# Altium PCB ThermalType_Arduino_v0.1.PcbDoc
Units mil, origin at the board's own origin, x right, y up, seen from the top; angles counter-clockwise.
Board outline 1800 x 1940 mil, 2 copper layers (Top Layer, Bottom Layer); 18 components, 25 nets, 104 pads, 69 vias.
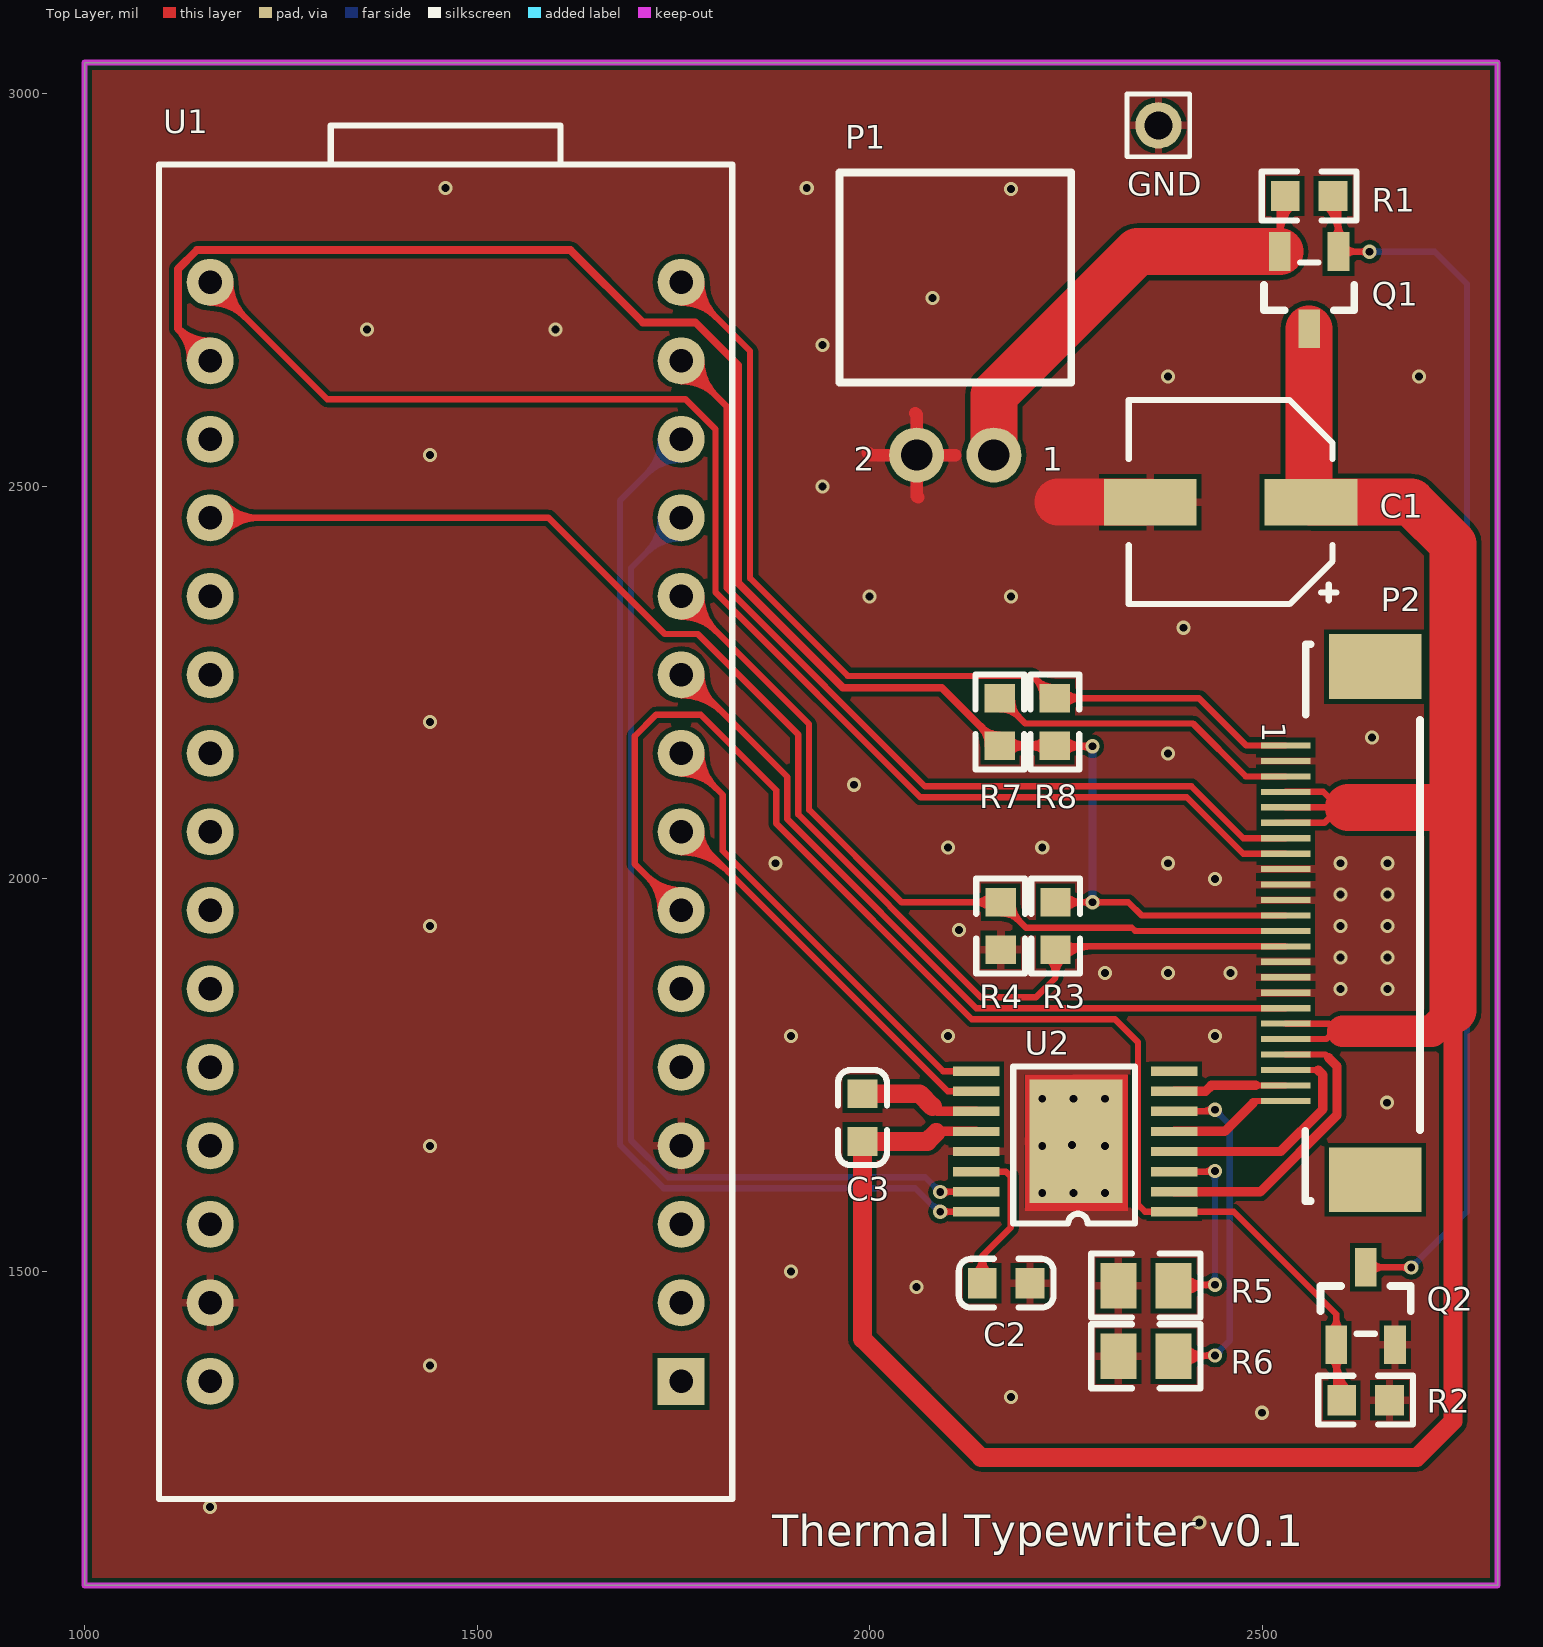
[diagram p0: Top Layer view]
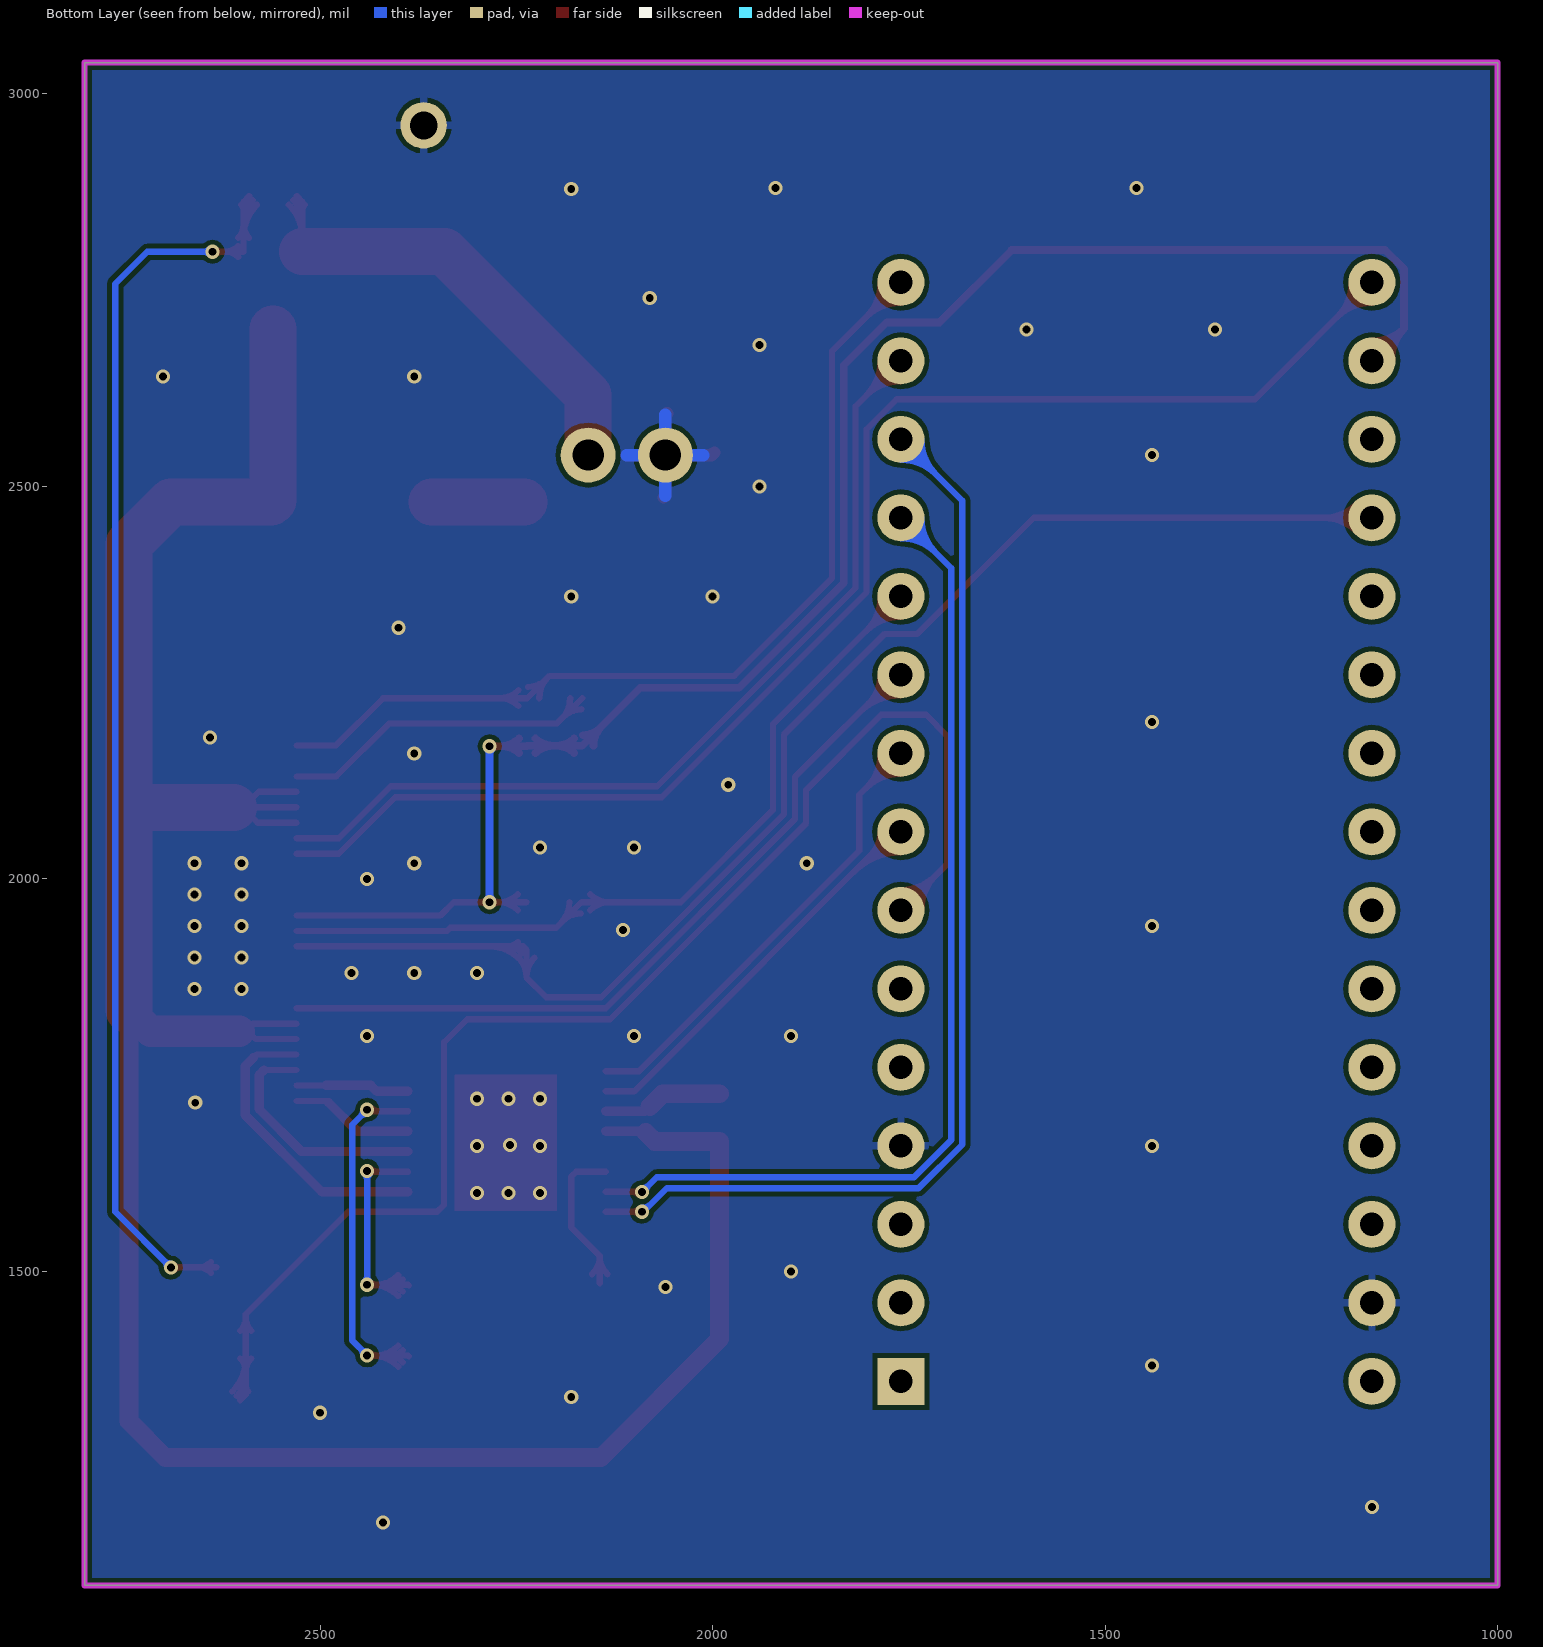
[diagram p1: Bottom Layer view, seen from below]
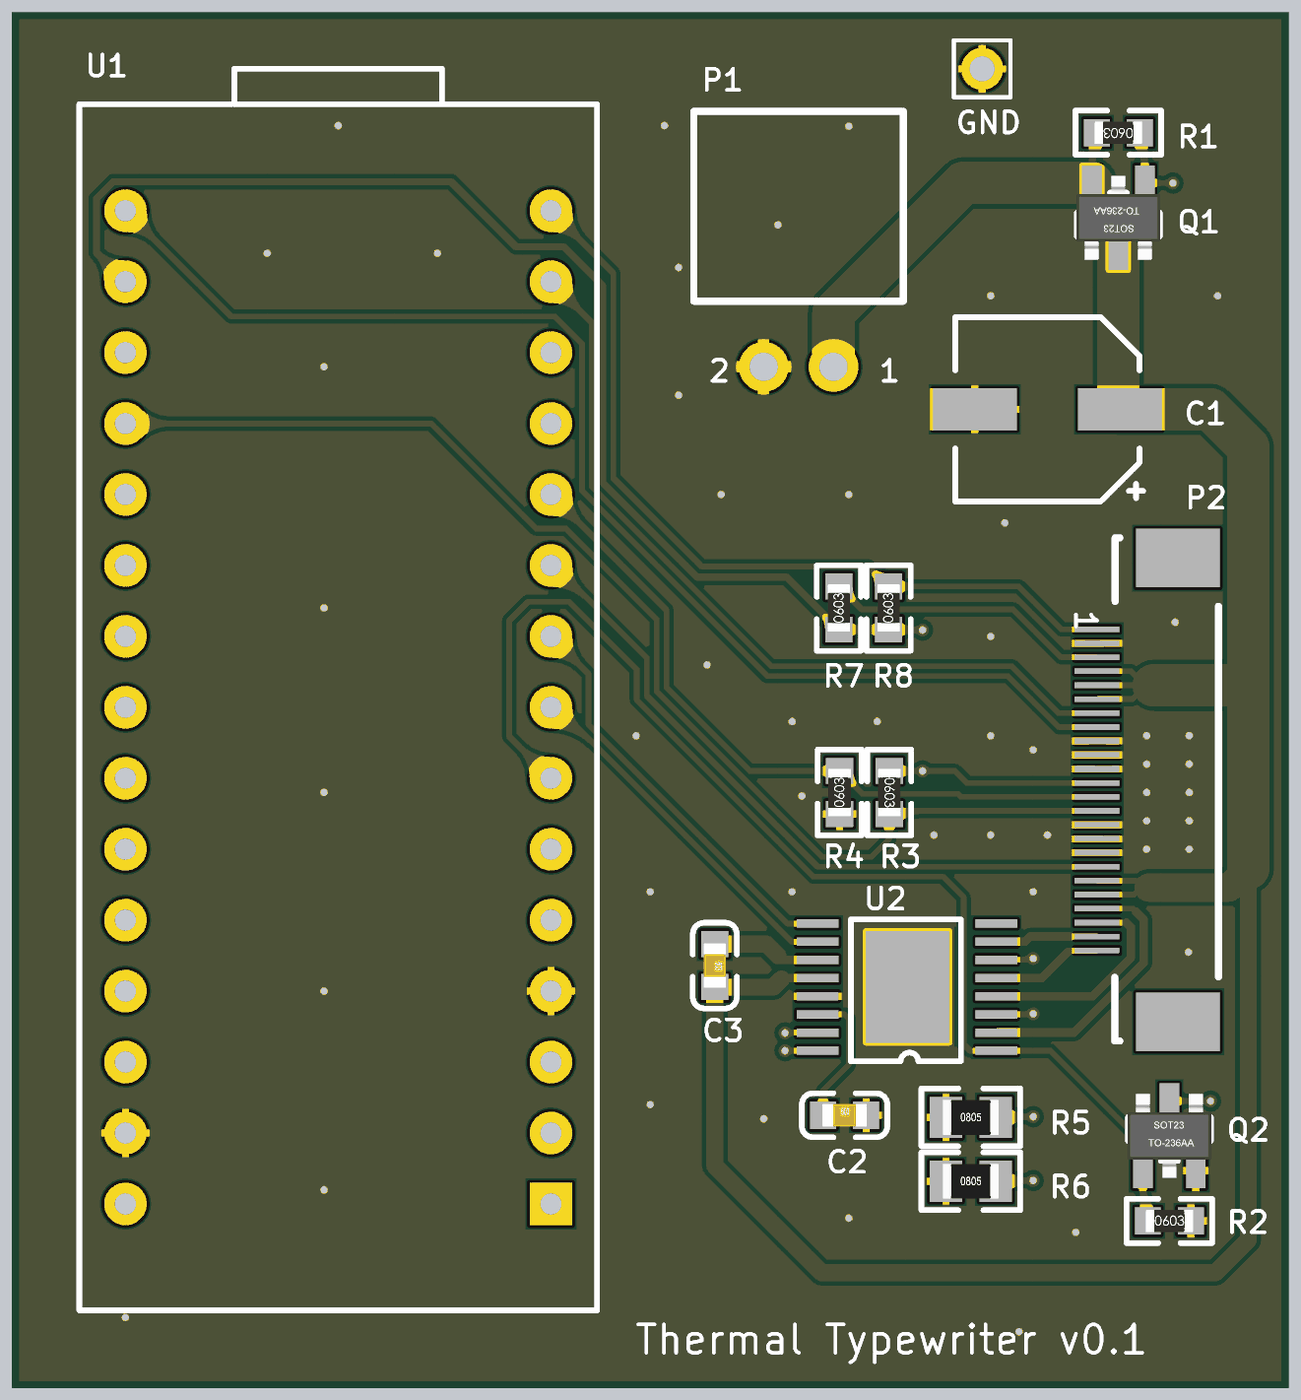
[diagram p2: 3D render of the assembled board from above, using the file's embedded part models]

## Layer stack, top to bottom
Top Layer: signal copper 1.4
Dielectric: dielectric 12.6, FR-4, Dk 4.8
Bottom Layer: signal copper 1.4

## Board outline
1000,1100 1000,3040 2800,3040 2800,1100

## Design rules (kind name [scope] priority, off if disabled: settings)
Clearance [All] p1: gap=6
MinimumSolderMaskSliver [All] p1: minsoldermaskwidth=3
PolygonConnect PolygonConnect_1 [IsVia] p1: connectstyle=Direct reliefconductorwidth=10 reliefentries=4 polygonreliefangle="90 Angle"
PolygonConnect [All] p2: connectstyle=Relief reliefconductorwidth=10 reliefentries=4 polygonreliefangle="90 Angle"
RoutingVias [All] p1: holewidth=10 width=18 viastyle="Through Hole" minholewidth=10 minwidth=18 maxholewidth=28 maxwidth=50
SilkToSilkClearance [All] p1: silktosilkclearance=3
SilkscreenOverComponentPads [All] p1: minsilkscreentomaskgap=3
SolderMaskExpansion [All] p1: expansion=4
TestPointUsage [All] p1: valid=0 allowmultiple=FALSE
Testpoint [All] p1: side=15 testpointundercomponent=TRUE minsize=40 maxsize=100 preferedsize=60 minholesize=0 maxholesize=40 preferedholesize=32 testpointgrid=1 style=1023 order=0123456789
Width [All] p1: maxlimit=100 minlimit=6 preferedwidth=10 minimp=50.000000 maximp=50.000000 favimp=50.000000
21 further rules are at their usual default settings.

## Components (designator, comment, footprint, x,y, rotation, side; value= is the part's Value field where it differs from the comment)
C1 "100uF/16V" CAP6.3*5.5 2460,2480 r180 top
C2 "2.2uF" LC-0603_C 2174,1485 r0 top
C3 "0.01uF" LC-0603_C 1991,1696 r90 top
GND "TP" TP 2368,2960 r0 top
P1 "Header 2" YX-XH-2-2.54-90 2109.21,2540 r180 top
P2 "Header 24" A1251AWV-24-0.5 2530,2170 r270 top
Q1 "2333" LC-SOT-23(SOT-23-3) 2560,2750 r90 top
Q2 "2N7002" LC-SOT-23(SOT-23-3) 2632,1456 r270 top
R1 "10K" LC-0603_R 2560,2870 r180 top
R2 "100K" LC-0603_R 2632,1336 r0 top
R3 "51K,1%" LC-0603_R 2237,1940 r90 top
R4 "10K" LC-0603_R 2167,1940 r270 top
R5 "0R6" LC-0805_R 2352,1482 r0 top
R6 "0R6" LC-0805_R 2352,1392 r0 top
R7 "200R" LC-0603_R 2166,2200 r270 top
R8 "22K" LC-0603_R 2236,2200 r270 top
U1 "arduinoNano" "ARDUINO NANO" 1760,1360 r90 top
U2 "DRV8833" HTSSOP-16 2388,1576 r180 top

## Footprints (in the part's own frame and the unit in brackets; to place one, negate y for a bottom-side part, rotate by r counter-clockwise, add the part's x,y. Pads: shape width x height; smd on the part's side, far side on the other; paste and mask are expansions set on the pad)
A1251AWV-24-0.5 [mm] "0.5mm间距立式单排接插件-24p"
  rect 2.1x3 smd: 0(-2.55,2.9) 0(14.05,2.9)
  rect 0.2x1.6 smd: 1(0,0) 2(0.5,0) 3(1,0) 4(1.5,0) 5(2,0) 6(2.5,0) 7(3,0) 8(3.5,0) 9(4,0) 10(4.5,0) 11(5,0) 12(5.5,0) 13(6,0) 14(6.5,0) 15(7,0) 16(7.5,0) 17(8,0) 18(8.5,0) 19(9,0) 20(9.5,0) 21(10,0) 22(10.5,0) 23(11,0) 24(11.5,0)
  silkscreen extent -3.28,0.64 14.74,4.35
"ARDUINO NANO" [mil]
  rect 60x60 hole 30: 1(0,0)
  round 60 hole 30: 2(100,0) 3(200,0) 4(300,0) 5(400,0) 6(500,0) 7(600,0) 8(700,0) 9(800,0) 10(900,0) 11(1000,0) 12(1100,0) 13(1200,0) 14(1300,0) 15(1400,0) 16(1400,600) 17(1300,600) 18(1200,600) 19(1100,600) 20(1000,600) 21(900,600) 22(800,600) 23(700,600) 24(600,600) 25(500,600) 26(400,600) 27(300,600) 28(200,600) 29(100,600) 30(0,600)
  silkscreen extent -150,-65 1600,665
CAP6.3*5.5 [mm] "6.3mm直径贴片电解电容，高度5.5mm"
  rect 3x1.5 smd: 1(-2.6,0) 2(2.6,0)
  silkscreen extent -3.43,-3.3 3.3,3.3, body extent -3.19,-3.09 3.19,3.3, height 5.5
HTSSOP-16 [mm]
  rect 1.5x0.3 smd: 1(0,0) 2(0,-0.65) 3(0,-1.3) 4(0,-1.95) 5(0,-2.6) 6(0,-3.25) 7(0,-3.9) 8(0,-4.55) 9(6.4,-4.55) 10(6.4,-3.9) 11(6.4,-3.25) 12(6.4,-2.6) 13(6.4,-1.95) 14(6.4,-1.3) 15(6.4,-0.65) 16(6.4,0)
  rect 3x4 smd: 13(3.175,-2.286)
  silkscreen extent 1.27,-4.7 5.21,0.38
LC-0603_C [mm]
  rect 0.93x0.98 smd: 1(-0.77,0) 2(0.77,0)
  silkscreen extent -1.53,-0.79 1.54,0.79, body extent -0.8,-0.4 0.8,0.4, height 0.3
LC-0603_R [mm]
  rect 0.93x0.98 smd: 1(-0.77,0) 2(0.77,0)
  silkscreen extent -1.53,-0.79 1.54,0.79, body extent -0.85,-0.4 0.85,0.4, height 0.56
LC-0805_R [mm]
  rect 1.16x1.47 smd: 1(-0.89,0) 2(0.89,0)
  silkscreen extent -1.77,-1.04 1.77,1.03, body extent -1,-0.62 1,0.63, height 0.49
LC-SOT-23(SOT-23-3) [mm]
  rect 1.25x0.7 smd: 1(1.25,-0.95) 2(1.25,0.95) 3(-1.25,0)
  silkscreen extent -0.65,-1.46 0.9,1.46, body extent -1.5,-1.5 1.5,1.5, height 1.3
TP [mm] "测试点，无需焊接"
  round 1.5 hole 0.9: 1(0,0)
  silkscreen extent -1.02,-1.02 1.02,1.02
YX-XH-2-2.54-90 [mil] "2.5mm间距单排接插件-2p"
  round 70 hole 40: 1(-49.21,0) 2(49.21,0)
  silkscreen extent -148,-360 148,-93

## Part data
C1 C2 C3: library part 0603C, "0603C"
GND: library part Socket, "Socket"
P1: "Header, 2-Pin"
P2: library part PT48D-HLV
Q1: library part CJ2333, "P-MOS"
Q2: library part NMOS-2, "N-Channel Power MOSFET"
R1 R2 R3 R4 R5 R6 R7 R8: library part 0603R, "0603R"

## Via types
v1: diameter 18, hole 10, Top Layer to Bottom Layer, tented both sides, 69 vias

## Nets (pads, with @x,y where several pads share a name; then routed paths per layer and width w, separated by ;. In a path a pad name is that pad's centre, name@x,y a point inside that pad or via, vN(x,y) a via of type N, cw(c..) or ccw(c..) an arc to the next point about the centre after c; other vN are vias at no path point)
+3.3V: P2.12 R3.2 R7.2 R8.2 U1.17 | length 2713.9
  Top Layer w8: R3.2 v1(2284,1970.32) 2329.68,1970.32 2346.54,1953.46 P2.12 ; R3.2@2248.1,1960.2 cw(c2272.52,1935.77) 2272.52,1970.32 cw(c2272.52,2004.86) R3.2@2248.1,1980.43 ; v1@2280.46,1966.78 ccw(c2271.93,1958.24) 2271.93,1970.32 ccw(c2271.93,1982.39) v1@2280.46,1973.85 ; v1@2287.54,1966.78 cw(c2296.07,1958.24) 2296.07,1970.32 cw(c2296.07,1982.39) v1@2287.54,1973.85
  Top Layer w10: U1.17@1135.01,2660.72 ccw(c1080.3,2662.3) 1119,2701 ; U1.17@1145.01,2660.43 ccw(c1112.18,2661.38) 1135.4,2684.6 ccw(c1158.62,2707.82) U1.17@1159.57,2674.99 ; U1.17@1159.28,2684.99 cw(c1157.7,2739.7) 1119,2701 ; U1.17 1119,2701 ; 2141.6,2194.08 cw(c2117.21,2169.68) R7.2@2151.71,2169.68 ; 2143.98,2191.71 ccw(c2165.02,2212.74) R7.2@2165.02,2182.99 ; R7.2@2176.39,2160.28 cw(c2199.11,2137.56) 2199.11,2169.68 cw(c2199.11,2201.81) R7.2@2176.39,2179.09 ; R8.2@2225.61,2160.28 ccw(c2202.89,2137.56) 2202.89,2169.68 ccw(c2202.89,2201.81) R8.2@2225.61,2179.09 ; R8.2@2246.39,2160.28 cw(c2267.46,2139.21) 2267.46,2169 ; R8.2@2246.39,2179.09 ccw(c2270.76,2203.46) 2270.76,2169 ; v1@2281.17,2166.17 ccw(c2274.34,2159.34) 2274.34,2169 ccw(c2274.34,2178.66) v1@2281.17,2171.83 ; v1(2284,2169) 2236.68,2169 R8.2 R7.2 2092.06,2243.62 1966.16,2243.62 1832.8,2376.99 1832.8,2654.2 1778,2709 1711,2709 1619,2801 1143.02,2801 1119,2776.98 1119,2701
  Bottom Layer w10: v1@2281.17,1973.14 ccw(c2274.34,1979.97) 2284,1979.97 ccw(c2293.66,1979.97) v1@2286.83,1973.14 ; v1@2281.17,2166.17 cw(c2274.34,2159.34) 2284,2159.34 cw(c2293.66,2159.34) v1@2286.83,2166.17 ; v1(2284,1970.32) v1(2284,2169)
BATTERY: P1.1 Q1.2 R1.2 | length 712.3
  Top Layer w8: Q1.2@2515.68,2816.95 ccw(c2498.99,2833.65) 2522.6,2833.65 ccw(c2546.21,2833.65) Q1.2@2529.51,2816.95 ; R1.2@2519.57,2858.9 cw(c2512.25,2851.58) R1.2@2522.6,2851.58 ; Q1.2 2522.6,2862.91 R1.2 ; Q1.2@2522.6,2817.37 cw(c2581.33,2817.37) R1.2@2539.8,2858.9 ; 2522.6,2836.68 cw(c2562.02,2836.68) R1.2@2534.14,2864.56
  Top Layer w60: P1.1 2158.43,2616.43 2341.21,2799.21 Q1.2
GND: C1.2 C2.2 GND.1 P1.2 P2.2 P2.9 P2.10 P2.11 P2.15 P2.16 P2.17 Q2.2 R2.2 R4.2 R5.1 R6.1 U1.4 U1.29 U2.13 | length 539.4
  Top Layer w16: 1998,2543 2001,2540 P1.2 ; 2058,2593 2060,2591 P1.2 ; 2062,2486 2060,2488 P1.2 ; 2109.43,2540 P1.2
  Top Layer w60: 2240,2480 C1.2
  Bottom Layer w16: 2012,2540 P1.2 ; 2060,2488 P1.2 ; 2060,2591 P1.2 ; 2109.43,2540 P1.2
  other v1: 2420,1180 1160,1200 2500,1320 2180,1340 1440,1380 2060,1480 1900,1500 2220,1600 2260,1600 2300,1600 1440,1660 2220,1660 2300,1660 2258,1661 2659,1715 2220,1720 2260,1720 2300,1720 1900,1800 2100,1800 2440,1800 2600,1860 2660,1860 2300,1880 2380,1880 2460,1880 2600,1900 2660,1900 2114,1935 1440,1940 2600,1940 2660,1940 2600,1980 2660,1980 2440,2000 1880,2020 2380,2020 2600,2020 2660,2020 2100,2040 2220,2040 1980,2120 2380,2160 2640,2180 1440,2200 2400,2320 2000,2360 2180,2360 1940,2500 1440,2540 2380,2640 2700,2640 1940,2680 1360,2700 1600,2700 2080,2740 2180,2879 1460,2880 1920,2880
MOT_1A: U1.13 U2.16 | length 1619
  Top Layer w8: v1(2090,1576) U2.16 ; v1@2093.54,1572.46 cw(c2102.07,1563.93) 2102.07,1576 cw(c2102.07,1588.07) v1@2093.54,1579.54
  Bottom Layer w8: U1.13@1734,2560 cw(c1671.23,2560) 1715.62,2515.62 cw(c1760,2471.23) U1.13@1760,2534 ; U1.13@1742,2560 cw(c1698.54,2560) 1729.27,2529.27 cw(c1760,2498.54) U1.13@1760,2542 ; U1.13 1682,2482 1682,1661.63 1737.63,1606 2058.13,1606 2088.13,1576 v1(2090,1576) ; 2078.27,1585.86 ccw(c2090,1597.59) v1@2090,1581
MOT_1B: U1.12 U2.15 | length 1491.7
  Top Layer w8: v1(2090,1601) 2090.59,1601.59 U2.15 ; v1@2093.54,1597.46 cw(c2103.5,1587.5) 2103.5,1601.59 ; v1@2093.54,1604.54 ccw(c2100.65,1611.65) 2100.65,1601.59
  Bottom Layer w8: U1.12@1734,2460 cw(c1671.23,2460) 1715.62,2415.62 cw(c1760,2371.23) U1.12@1760,2434 ; U1.12@1742,2460 cw(c1698.54,2460) 1729.27,2429.27 cw(c1760,2398.54) U1.12@1760,2442 ; U1.12 1696,2396 1696,1667.43 1743.43,1620 2071,1620 v1(2090,1601) ; v1@2085,1601 ccw(c2072.93,1601) 2081.46,1609.54 ccw(c2090,1618.07) v1@2090,1606
MOT_2A: U1.9 U2.9 | length 752.3
  Top Layer w8: U1.9@1760,2134 cw(c1760,2071.23) 1804.38,2115.62 cw(c1848.77,2160) U1.9@1786,2160 ; U1.9@1760,2142 cw(c1760,2098.54) 1790.73,2129.27 cw(c1821.46,2160) U1.9@1778,2160 ; U1.9 1813,2107 1813,2035.8 2093.66,1755.13 U2.9
MOT_2B: U1.8 U2.10 | length 698.7
  Top Layer w8: U1.8@1760,2034 cw(c1760,1949.5) 1819.75,2009.25 ; U1.8@1760,2042 cw(c1760,1976.82) 1806.09,2022.91 ; U1.8@1760,2050 cw(c1760,2004.13) 1792.44,2036.56 ; U1.8 1769,2060 2099.46,1729.54 U2.10 ; U1.8@1786,2060 ccw(c1827.04,2060) 1798.02,2030.98
MOTOR1: P2.21 U2.2 | length 381.8
  Top Layer w8: P2.21 2580.7,1776.3 2585,1772
  Top Layer w12: U2.2 2497.86,1601.59 2595.5,1699.22 2595.5,1761.5 2585,1772
MOTOR2: P2.22 U2.4 | length 306.5
  Top Layer w8: P2.22 2571.39,1756.61 2572,1756
  Top Layer w12: U2.4 2523.59,1652.77 2577.5,1706.68 2577.5,1750.5 2571.39,1756.61
MOTOR3: P2.23 U2.7 | length 145.1
  Top Layer w8: 2492,1737 2529.93,1737 P2.23
  Top Layer w12: U2.7 2428,1729.54 2435.46,1737 2492,1737
MOTOR4: P2.24 U2.5 | length 158.1
  Top Layer w8: 2489,1715 2491,1717 2529.76,1717 P2.24
  Top Layer w12: U2.5 2452.36,1678.36 2489,1715
NetC2_1: C2.1 U2.14 | length 249.8
  Top Layer w8: C2.1@2133.75,1496.28 ccw(c2111.15,1519.68) 2143.68,1519.68 ; U2.14 2173.82,1627.18 2180,1621 2180,1556 2143.68,1519.68 ; C2.1 2143.68,1519.68 ; C2.1@2153.62,1496.28 cw(c2176.22,1519.68) 2143.68,1519.68
NetC3_2: C3.2 U2.11 | length 154.3
  Top Layer w12: 2080,1710 2086.05,1703.95 U2.11
  Top Layer w24: C3.2 2063.68,1726.32 2080,1710
NetP2_3: P2.3 R7.1 | length 459.5
  Top Layer w8: R7.1 2198.32,2197.99 2412.01,2197.99 2479.37,2130.63 P2.3 ; R7.1@2166.98,2216.01 cw(c2166.98,2183.84) 2189.73,2206.59 ; R7.1@2181.29,2230.31 ccw(c2218.21,2230.31) 2192.1,2204.21
NetQ1_1: Q1.1 Q2.3 R1.1 | length 1867.2
  Top Layer w8: R1.1@2580.2,2858.9 cw(c2538.67,2817.37) Q1.1@2597.4,2817.37 ; R1.1@2585.86,2864.56 cw(c2557.98,2836.68) 2597.4,2836.68 ; R1.1 2597.4,2862.91 Q1.1 2597.61,2799 v1(2637,2799) ; Q1.1@2590.49,2816.95 ccw(c2573.79,2833.65) 2597.4,2833.65 ccw(c2621.01,2833.65) Q1.1@2604.32,2816.95 ; R1.1@2597.4,2851.58 cw(c2607.75,2851.58) R1.1@2600.43,2858.9 ; Q1.1@2604.32,2792.3 cw(c2620.5,2776.12) 2620.5,2799 ; Q1.1@2604.32,2806.13 ccw(c2621.52,2823.34) 2621.52,2799 ; Q2.3 2689.79,1505.21 v1(2690,1505) ; v1@2633.46,2795.46 ccw(c2624.93,2786.93) 2624.93,2799 ccw(c2624.93,2811.07) v1@2633.46,2802.54 ; Q2.3@2638.92,1498.3 cw(c2655.61,1481.6) 2655.61,1505.21 cw(c2655.61,1528.82) Q2.3@2638.92,1512.13 ; 2677.42,1505.21 cw(c2677.42,1492.42) v1@2686.46,1501.46 ; 2678.44,1505.21 ccw(c2678.44,1516.56) v1@2686.46,1508.54
  Bottom Layer w8: v1(2637,2799) 2720,2799 2761,2758 2761,1576 v1(2690,1505) ; v1@2640.54,2795.46 cw(c2649.07,2786.93) 2649.07,2799 cw(c2649.07,2811.07) v1@2640.54,2802.54 ; v1@2690,1510 ccw(c2690,1522.07) 2698.54,1513.54 ccw(c2707.07,1505) v1@2695,1505
NetR5_2: R5.2 U2.3 | length 439.1
  Top Layer w8: R5.2 2388.04,1483 v1(2440,1483) ; U2.3 2439.18,1627.18 v1(2440,1628) ; R5.2@2394.7,1474.34 cw(c2415.61,1453.43) 2415.61,1483 ; R5.2@2394.7,1489.66 ccw(c2410.78,1505.74) 2410.78,1483 ; R5.2@2400.36,1468.68 cw(c2434.92,1434.12) v1@2434.92,1483 ; R5.2@2400.36,1495.32 ccw(c2430.1,1525.06) 2430.1,1483 ; 2425.95,1627.18 ccw(c2425.95,1642.05) v1@2436.46,1631.54 ; 2429.91,1627.18 cw(c2429.91,1617.91) v1@2436.46,1624.46 ; v1@2436.46,1479.46 ccw(c2427.93,1470.93) 2427.93,1483 ccw(c2427.93,1495.07) v1@2436.46,1486.54
  Bottom Layer w8: v1@2436.46,1486.54 ccw(c2427.93,1495.07) 2440,1495.07 ccw(c2452.07,1495.07) v1@2443.54,1486.54 ; v1@2436.46,1624.46 cw(c2427.93,1615.93) 2440,1615.93 cw(c2452.07,1615.93) v1@2443.54,1624.46 ; v1(2440,1483) v1(2440,1628)
NetR6_2: R6.2 U2.6 | length 619.3
  Top Layer w8: R6.2 2388.04,1393 v1(2440,1393) ; U2.6 2437.95,1703.95 v1(2440,1706) ; R6.2@2394.7,1384.34 cw(c2415.61,1363.43) 2415.61,1393 ; R6.2@2394.7,1399.66 ccw(c2410.78,1415.74) 2410.78,1393 ; R6.2@2400.36,1378.68 cw(c2434.92,1344.12) v1@2434.92,1393 ; R6.2@2400.36,1405.32 ccw(c2430.1,1435.06) 2430.1,1393 ; 2422.99,1703.95 ccw(c2422.99,1723.01) v1@2436.46,1709.54 ; v1@2436.46,1389.46 ccw(c2427.93,1380.93) 2427.93,1393 ccw(c2427.93,1405.07) v1@2436.46,1396.54
  Bottom Layer w8: v1(2440,1393) 2459,1412 2459,1687 v1(2440,1706) ; v1@2440,1398 ccw(c2440,1410.07) 2448.54,1401.54 ccw(c2457.07,1393) v1@2445,1393 ; v1@2440,1701 cw(c2440,1688.93) 2448.54,1697.46 cw(c2457.07,1706) v1@2445,1706
PAPER_SNS: P2.1 R8.1 U1.15 | length 1459
  Top Layer w8: U1.15@1760,2734 cw(c1760,2671.23) 1804.38,2715.62 cw(c1848.77,2760) U1.15@1786,2760 ; U1.15@1760,2742 cw(c1760,2698.54) 1790.73,2729.27 cw(c1821.46,2760) U1.15@1778,2760 ; U1.15 1847.8,2672.2 1847.8,2383.2 1972.38,2258.62 2207.69,2258.62 R8.1 2419.69,2230.31 2480,2170 P2.1 ; 2209.9,2256.42 cw(c2183.79,2230.31) R8.1@2220.71,2230.31 ; 2212.27,2254.04 ccw(c2235.02,2276.79) R8.1@2235.02,2244.62 ; R8.1@2247.1,2220.2 cw(c2271.52,2195.77) 2271.52,2230.31 cw(c2271.52,2264.86) R8.1@2247.1,2240.43
PRN_LATCH: P2.18 U1.10 | length 1172.5
  Top Layer w8: U1.10@1760,2234 cw(c1760,2159.29) 1812.83,2212.12 ; U1.10@1760,2242 cw(c1760,2186.61) 1799.17,2225.78 ; U1.10@1760,2250 cw(c1760,2213.92) 1785.51,2239.43 ; U1.10 1764.94,2260 1895,2129.94 1895,2076.4 2136.05,1835.35 P2.18 ; U1.10@1778,2260 ccw(c1809.52,2260) 1787.23,2237.71 ; U1.10@1786,2260 ccw(c1836.83,2260) 1800.89,2224.06
PRN_MOSI: P2.7 U1.14 | length 1324.3
  Top Layer w8: U1.14@1760,2634 cw(c1760,2571.23) 1804.38,2615.62 cw(c1848.77,2660) U1.14@1786,2660 ; U1.14@1760,2642 cw(c1760,2598.54) 1790.73,2629.27 cw(c1821.46,2660) U1.14@1778,2660 ; U1.14 1817.8,2602.2 1817.8,2370.77 2070.57,2118 2410,2118 2476.11,2051.89 P2.7
PRN_POWER: Q2.1 R2.1 U1.7 U2.1 | length 2052.2
  Top Layer w8: U1.7@1734,1960 ccw(c1671.23,1960) 1715.62,2004.38 ccw(c1760,2048.77) U1.7@1760,1986 ; U1.7@1742,1960 ccw(c1698.54,1960) 1729.27,1990.73 ccw(c1760,2021.46) U1.7@1760,1978 ; U1.7 1701,2019 1701,2182 1728,2209 1785,2209 1881,2113 1881,2070.6 2130.25,1821.35 2312.65,1821.35 2342,1792 2342,1585 2351,1576 U2.1 2464,1576 2594.6,1445.4 Q2.1 2594.6,1343.09 R2.1 ; Q2.1@2587.68,1389.05 cw(c2570.99,1372.35) 2594.6,1372.35 cw(c2618.21,1372.35) Q2.1@2601.51,1389.05 ; Q2.1@2587.68,1424.53 ccw(c2570.99,1441.22) 2594.6,1441.22 ccw(c2618.21,1441.22) Q2.1@2601.51,1424.53 ; R2.1@2591.57,1347.1 ccw(c2584.25,1354.42) R2.1@2594.6,1354.42 ; 2594.6,1369.32 ccw(c2634.02,1369.32) R2.1@2606.14,1341.44 ; Q2.1@2594.6,1388.63 ccw(c2653.33,1388.63) R2.1@2611.8,1347.1
PRN_SCLK: P2.8 U1.16 | length 1960
  Top Layer w8: U1.16@1160,2734 cw(c1160,2671.23) 1204.38,2715.62 cw(c1248.77,2760) U1.16@1186,2760 ; U1.16@1160,2742 cw(c1160,2698.54) 1190.73,2729.27 cw(c1221.46,2760) U1.16@1178,2760 ; U1.16 1309,2611 1765.57,2611 1803.8,2572.77 1803.8,2364.98 2064.77,2104 2404.2,2104 2476,2032.2 P2.8
PRN_STROBE: P2.13 R4.1 U1.11 | length 1285.8
  Top Layer w8: U1.11@1760,2334 cw(c1760,2271.23) 1804.38,2315.62 cw(c1848.77,2360) U1.11@1786,2360 ; U1.11@1760,2342 cw(c1760,2298.54) 1790.73,2329.27 cw(c1821.46,2360) U1.11@1778,2360 ; U1.11 1923,2197 1923,2088 2040.69,1970.31 R4.1 2199.32,1937.99 2334.01,1937.99 2338.22,1933.78 P2.13 ; R4.1@2155.9,1960.2 ccw(c2131.48,1935.77) 2131.48,1970.31 ccw(c2131.48,2004.86) R4.1@2155.9,1980.43 ; R4.1@2167.98,1956.01 cw(c2167.98,1923.84) 2190.73,1946.59 ; R4.1@2182.29,1970.31 ccw(c2219.21,1970.31) 2193.1,1944.21
PRN_TEMP: P2.14 R3.1 U1.19 | length 2029.2
  Top Layer w8: U1.19 1591,2460 1739,2312 1781,2312 1909,2184 1909,2082.2 2141.85,1849.35 2212,1849.35 2237,1874.35 R3.1 2241.41,1914.09 P2.14 ; U1.19@1172.73,2447.27 cw(c1203.46,2416.54) 1203.46,2460 cw(c1203.46,2503.46) U1.19@1172.73,2472.73 ; U1.19@1178.38,2441.62 cw(c1222.77,2397.23) 1222.77,2460 cw(c1222.77,2522.77) U1.19@1178.38,2478.38 ; R3.1@2226.88,1899.57 cw(c2202.46,1875.14) 2237,1875.14 cw(c2271.54,1875.14) R3.1@2247.12,1899.57 ; R3.1@2242.44,1905.23 cw(c2263.86,1883.81) 2263.86,1914.09 ; R3.1@2248.1,1899.57 cw(c2283.17,1864.5) 2283.17,1914.09 ; R3.1@2248.1,1919.8 ccw(c2261.88,1933.58) 2261.88,1914.09
VPRT: C1.1 C3.1 P2.4 P2.5 P2.6 P2.19 P2.20 Q1.3 U2.12 | length 3449.2
  Top Layer w8: P2.20 2581.98,1795.98 2590,1804 2590,1806 ; P2.19 2585,1815.67 2594.67,1806 2603,1806 ; P2.6 2579.57,2071.57 2599,2091 2610,2091 2609.74,2091.26 2597.74,2091.26 ; P2.5 2597.74,2091.26 ; P2.4 2578.06,2110.94 2597.74,2091.26
  Top Layer w12: 2085,1677 2086.36,1678.36 U2.12
  Top Layer w24: 2085,1677 2073.68,1665.68 C3.1 1991,1414 2142,1263 2697,1263 2743.23,1309.23 2743.23,1833.23
  Top Layer w40: 2603,1806 2716,1806 2743.23,1833.23
  Top Layer w60: Q1.3 2560,2482.36 C1.1 2690,2480 2743.23,2426.77 2743.23,2091 ; 2610,2091 2743.23,2091 ; 2743.23,1833.23 2743.23,2091
pads on no net: P2.0 U1.1 U1.2 U1.3 U1.5 U1.6 U1.18 U1.20 U1.21 U1.22 U1.23 U1.24 U1.25 U1.26 U1.27 U1.28 U1.30 U2.8

## Polygon pours and split planes (outlines as drawn)
GND on Top Layer "Top Layer-GND" (solid, remove dead copper, pour order 1000): 960,3080 960,1060 2840,1060 2840,3080
GND on Bottom Layer "Bottom Layer-GND" (solid, remove dead copper, pour order 1001): 960,3080 960,1060 2840,1060 2840,3080

## Keep-outs
Keep-Out Layer:
  the board outline again, w7.87

## Other copper
Top Layer:
  rectangle net GND: 2197.94,1577 2329,1750.74

## Silkscreen, mask and mechanical layers (free items; w line width, h text height)
Top Overlay:
  text "Thermal Typewriter v0.1" at 1876,1150 h40

## Text inside footprints (layer, text, board x,y; h text height)
P1: Top Overlay "1" at 2220,2520 h30; Top Overlay "2" at 1980,2520 h30
P2: Top Overlay "1" at 2500,2200 h30 r270